# Altium PCB 串口版第二版.PcbDoc
Units mil, origin at the board's own origin, x right, y up, seen from the top; angles counter-clockwise.
Board outline 535 x 839 mil, 2 copper layers (Top Layer, Bottom Layer); 17 components, 17 nets, 68 pads, 17 vias.
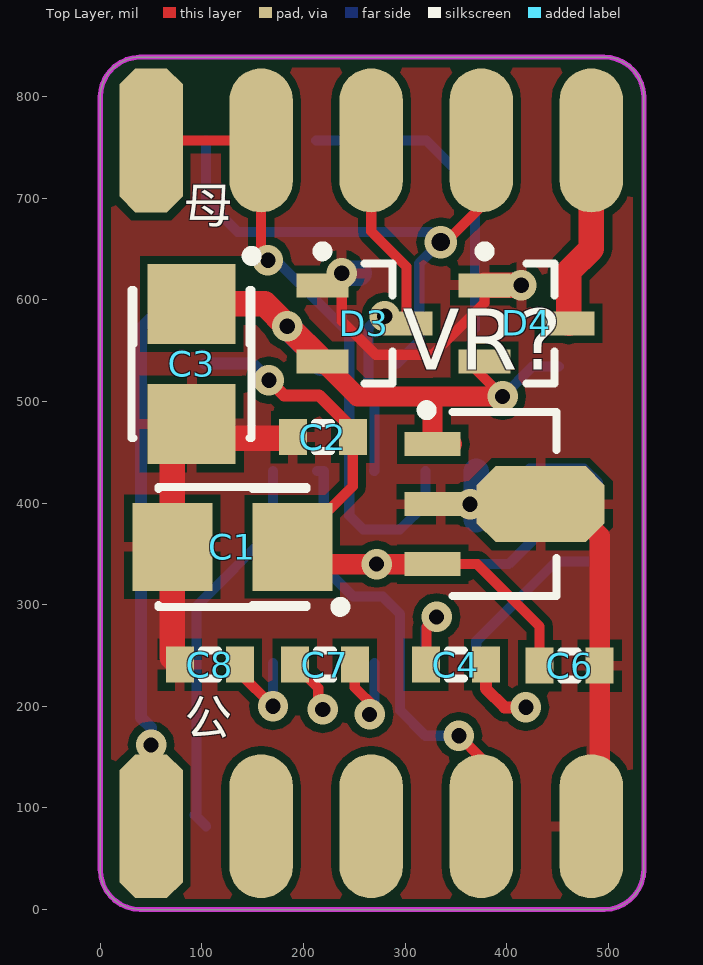
[diagram p0: Top Layer view]
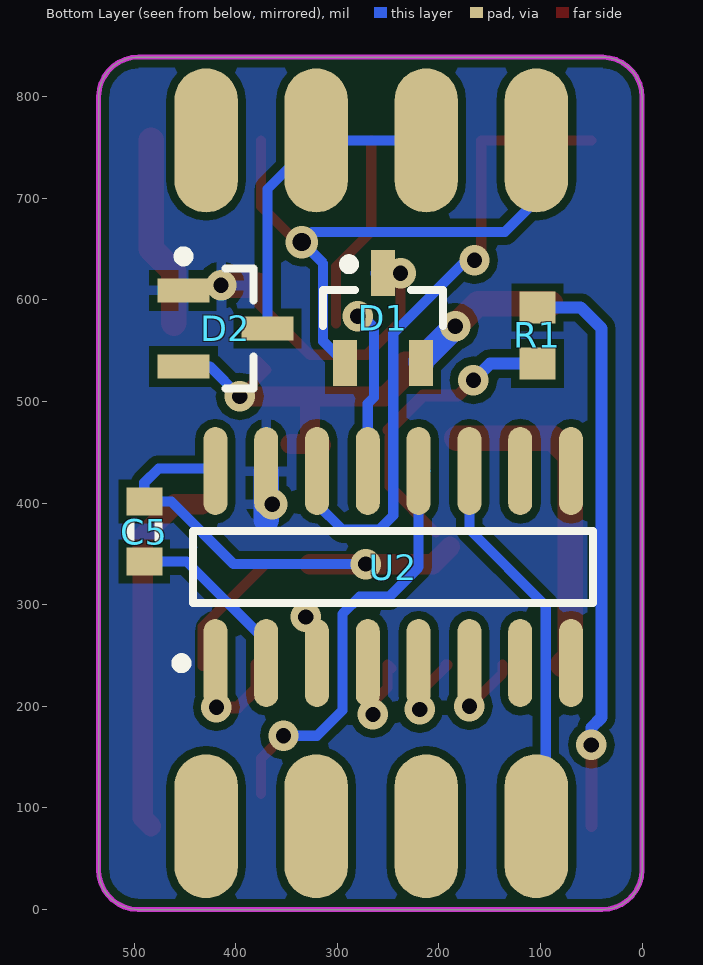
[diagram p1: Bottom Layer view, seen from below]
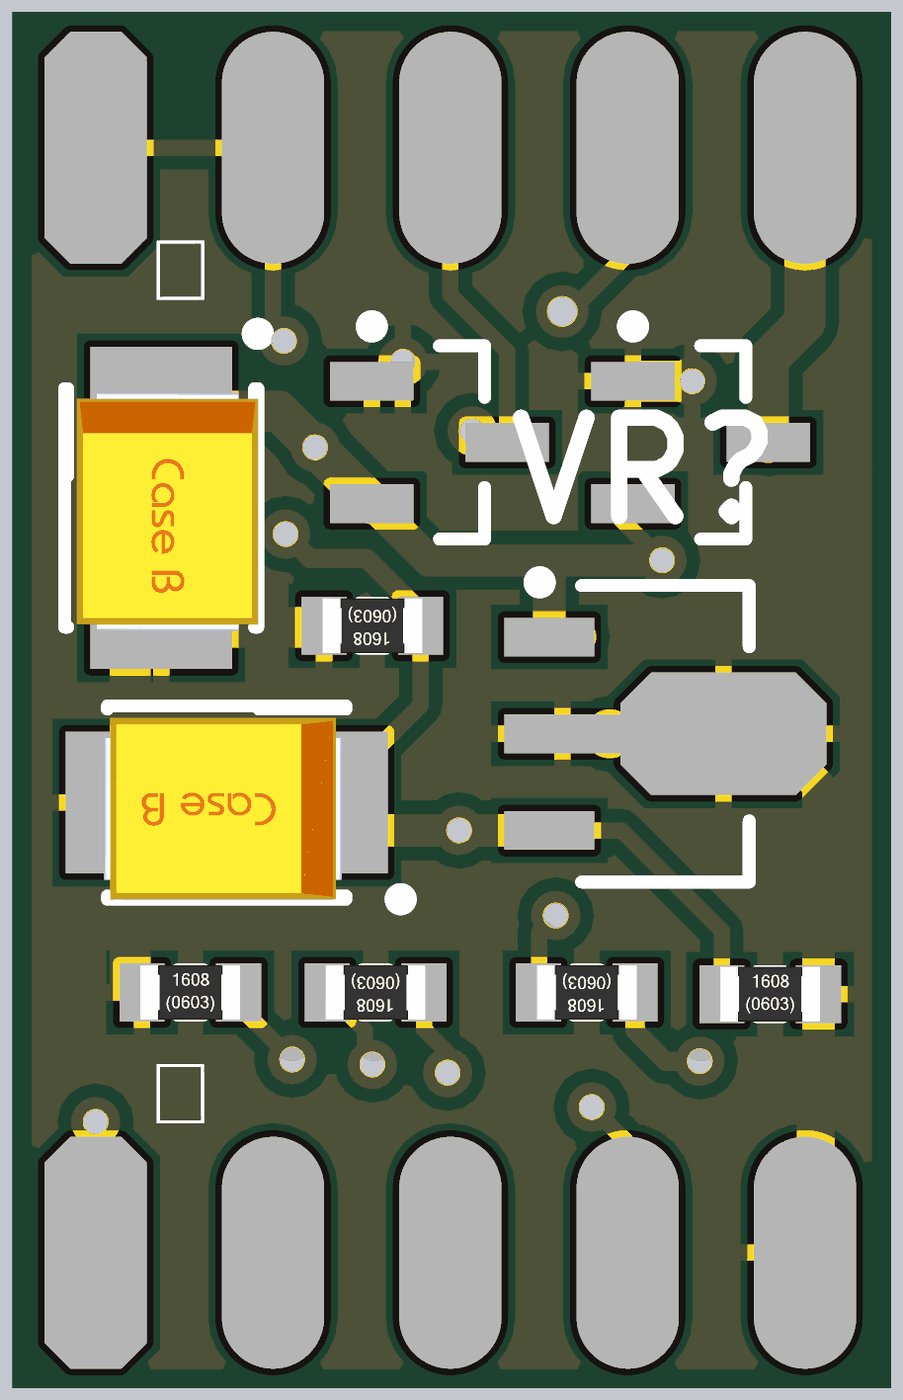
[diagram p2: 3D render of the assembled board from above, using the file's embedded part models]

## Layer stack, top to bottom
Top Layer: signal copper 1.4
Dielectric: dielectric 12.6, FR-4, Dk 4.8
Bottom Layer: signal copper 1.4

## Board outline
0,38.71 0,799.63 cw(c39.37,799.63) 38.71,838.99 38.71,839 495.63,839 cw(c495.63,799.63) 534.99,800.29 535,800.29 535,39.37 cw(c495.63,39.37) 496.29,0.01 496.29,0 39.37,0 cw(c39.37,39.37)

## Design rules (kind name [scope] priority, off if disabled: settings)
Clearance [All] p1: gap=8
PolygonConnect [All] p1: connectstyle=Relief reliefconductorwidth=10 reliefentries=4 polygonreliefangle="90 Angle"
RoomDefinition 串口板第二版 [InComponentClass('串口板第二版')] p1: confinementstyle=ConfineIn formatcopy=TRUE outline 0,7 534.57,7 534.57,832 0,832
RoutingVias [All] p1: holewidth=18 width=32 viastyle="Through Hole" minholewidth=15 minwidth=30 maxholewidth=28 maxwidth=50
SilkscreenOverComponentPads [All] p1: minsilkscreentomaskgap=10
SolderMaskExpansion [All] p1: expansion=4
Width [All] p1: maxlimit=100 minlimit=6 preferedwidth=10
27 further rules are at their usual default settings.

## Components (designator, comment, footprint, x,y, rotation, side; value= is the part's Value field where it differs from the comment)
C1 "Cap Pol1" 3528 130,357 r180 top
C2 "0.1uF" 0603R 219,465 r180 top
C3 "Cap Pol1" 3528 90,537 r270 top
C4 "0.1uF" 0603R 350,241 r180 top
C5 "0.1uF" 0603R 490,372 r90 bottom
C6 "0.1uF" 0603R 462,240 r0 top
C7 "0.1uF" 0603R 221,241 r180 top
C8 "0.1uF" 0603R 107.81,241 r0 top
D1 "BAT54S" SOT23_N#1 255,582 r90 bottom
D2 "BAT54S" SOT23_N#2 410,572 r180 bottom
D3 "BAT54S" SOT23_N#2 260,577 r0 top
D4 "BAT54S" SOT23_N#2 419.57,577 r0 top
R1 "Res2" 1608[0603] 103,565 r270 bottom
U2 "MAX232ESE" SOIC16_N 245,337 r90 bottom
VR? "Volt Reg" SOT89N 398,399 r0 top
公 "DB9" DB9BSM 50,82 r0 top
母 "DB9" DB9BSM 50,757 r0 top (schematic designator ĸ)

## Footprints (in the part's own frame and the unit in brackets; to place one, negate y for a bottom-side part, rotate by r counter-clockwise, add the part's x,y. Pads: shape width x height; smd on the part's side, far side on the other; paste and mask are expansions set on the pad)
0603R [mm]
  rect 0.7x0.9 smd: 1(-0.75,0) 2(0.75,0)
  silkscreen extent -0.2,-0.35 0.2,0.35, body extent -0.77,-0.42 0.78,0.43, height 0.45
1608[0603] [mm] "Chip Capacitor, Body 1.6x0.8mm, I"
  rect 0.8x0.9 smd: 1(-0.7,0) 2(0.7,0)
  body extent -0.87,-0.48 0.87,0.48, height 1.3
3528 [mm] "Capacitor, SM Tantalum; Body 3.5 x 2"
  rect 2x2.2 smd: 1(-1.5,0) 2(1.5,0)
  silkscreen extent -2.83,-1.5 1.85,1.62, body extent -1.79,-1.31 1.9,1.51, height 2.74
DB9BSM [mil]
  oct 62.5x141.67 smd: 1(0,0)
  oval 62.5x141.67 smd: 2(108.33,0) 3(216.67,0) 4(325,0) 5(433.33,0)
  oval 62.5x141.67 smd far side: 6(54.17,0) 7(162.5,0) 8(270.83,0) 9(379.17,0)
SOIC16_N [mm] "SOIC, 16-Leads, Body 9.9x3.9mm, Pitch 1.27mm, IPC"
  oval 2.2x0.6 smd: 1(-2.4,4.445) 2(-2.4,3.175) 3(-2.4,1.905) 4(-2.4,0.635) 5(-2.4,-0.635) 6(-2.4,-1.905) 7(-2.4,-3.175) 8(-2.4,-4.445) 9(2.4,-4.445) 10(2.4,-3.175) 11(2.4,-1.905) 12(2.4,-0.635) 13(2.4,0.635) 14(2.4,1.905) 15(2.4,3.175) 16(2.4,4.445)
  silkscreen extent -2.52,-5 0.9,5.42, body extent -2,-5 2,5, height 1.91
SOT23_N#1 [mm] "SOT23, 3-Leads, Body 2.9x1.3mm, Pitch 0.95mm, Lead Span 2.3mm - Reverse Pinning, IPC"
  rect 1.15x0.6 smd: 1(1.125,0) 2(-1.125,-0.95) 3(-1.125,0.95)
  silkscreen extent -0.2,-1.5 1.47,1.5, body extent -0.7,-1.5 0.7,1.5, height 1.1
SOT23_N#2 [mm] "SOT23, 3-Leads, Body 2.9x1.3mm, Pitch 0.95mm, Lead Span 2.3mm, IPC"
  rect 1.3x0.6 smd: 1(-1.05,0.95) 2(-1.05,-0.95) 3(1.05,0)
  silkscreen extent -1.18,-1.5 0.7,1.92, body extent -0.7,-1.5 0.7,1.5, height 1.1
SOT89N [mm] "SOT89, 3-Leads, Body 4.5x2.4 mm, Pitch 1.5mm, Lead Span 4.1mm, IPC Medium De"
  rect 1.4x0.6 smd: 1(-1.8,1.5) 3(-1.8,-1.5)
  rect 1.8x0.6 smd: 2(-1.6,0)
  oct 3.2x1.9 smd: 2(0.9,0)
  silkscreen extent -2.07,-2.3 1.3,2.47, body extent -1.3,-2.3 1.3,2.3, height 1.6

## Part data
C1 C3: "Polarized Capacitor (Radial)"
C2 C4 C5 C6 C7 C8: library part CAP, "Capa"
D1 D2 D3 D4: "Schottky Barrier Double Diode"
R1: "Resistor"
U2: "+5V Powered, Multi-Channel RS-232 Driver/Receiver"
VR?: "Voltage Regulator"

## Via types
v1: diameter 30, hole 15, Top Layer to Bottom Layer, tented both sides, 16 vias
v2: diameter 32, hole 18, Top Layer to Bottom Layer, tented both sides, 1 vias

## Nets (pads, with @x,y where several pads share a name; then routed paths per layer and width w, separated by ;. In a path a pad name is that pad's centre, name@x,y a point inside that pad or via, vN(x,y) a via of type N, cw(c..) or ccw(c..) an arc to the next point about the centre after c; other vN are vias at no path point)
GND: C1.2 C2.2 C3.2 C6.2 C8.1 D1.1 D2.1 D3.1 D4.1 U2.15 VR?.2 公.5 | length 1028.5
  Top Layer w10: v1(237.71,626.29) 237.71,579.29 271,546 327,546 378.23,597.23 D4.1
  Top Layer w20: VR?.2@433.43,399 460,399 491.53,367.47 C6.2 491.53,90.2 公.5
  Top Layer w25: C8.1 70.94,248.33 C1.2 70.94,447 87.94,464 C2.2@182.47,464 ; D4.1 v1(414.4,614.4)
  Bottom Layer w25: v1(237.71,626.29) D1.1 ; 370,383.81 U2.15
  other v1: 364,399
NetC4_1: C4.1 U2.1 | length 70.7
  Top Layer w11.81: C4.1 379.53,217.47 398,199 v1(419,199)
NetC4_2: C4.2 U2.3 | length 103.2
  Top Layer w10: C4.2@321,239 321,278 v1(331,288)
  Bottom Layer w10: U2.3 320,277 v1(331,288)
NetC5_1: C5.1 U2.2 | length 174
  Bottom Layer w10: U2.2 370,264 448.47,342.47 C5.1
NetC7_1: C7.1 U2.4 | length 116.7
  Top Layer w10: C7.1@247,237.47 C7.1 250.53,218.47 270,199 265,194 v1(265,192)
  Bottom Layer w10: v1(265,192) 270,197 U2.4
NetC7_2: C7.2 U2.5 | length 57.4
  Top Layer w10: C7.2@193.49,241 C7.2 214.47,218 214.47,201.53 v1(219,197)
NetC8_2: C8.2 U2.6 | length 110.7
  Top Layer w10: C8.2 137.33,232.67 v1(170,200) v1@160.33,209.67
  Bottom Layer w10: v1(170,200) U2.6
NetD1_3: D1.3 母.4 母.6 | length 563.3
  Top Layer w10: v2(335,657) 340,657 375,692 母.4
  Bottom Layer w10: 母.6 104.17,697.83 135,667 325,667 v2(335,657) 314,636 314,559.31 D1.3
NetD2_3: D2.3 母.7 母.8 | length 313.1
  Bottom Layer w10: 母.7 母.8 368.66,709.17 D2.3
NetD4_3: D4.3 母.5 | length 189.3
  Top Layer w25: D4.3 460.91,627.91 483.33,650.33 母.5
RX: U2.14 母.1 母.2 | length 641.7
  Top Layer w10: 母.1 母.2 158.33,645.67 v1(165,639)
  Bottom Layer w10: v1(165,639) 173,639 245,567 245,387.81 258.81,374 295,374 320,399 U2.14
RXD0: U2.12 公.4 | length 424.5
  Top Layer w10: v1(353,171) 375,149 公.4@375,114
  Bottom Layer w10: U2.12@213.49,431.49 U2.12 220,337 249,308 278,308 295,291 295,196 320,171 v1(353,171)
TX: D3.3 U2.13 母.3 | length 350.3
  Top Layer w10: 母.3 266.67,667.33 301.34,632.66 D3.3
  Bottom Layer w10: U2.13@269.59,431.9 U2.13 270,498 264,504 264,573 v1@272,581
  other v1: 280,584
TXD0: U2.11 公.6 | length 387.1
  Bottom Layer w10: 公.6@93,93.17 公.6@94.81,91.36 ; 公.6 公.6@94.81,91.36 ; U2.11 170,374 94.81,298.81 公.6@94.81,91.36
VCC5V: R1.1 公.1 | length 572.7
  Top Layer w11.81: 公.1 v1@50,169
  Bottom Layer w11.81: v1(50,162) 50,179 40,189 40,572 60.56,592.56 R1.1
VDD5V: C1.1 C2.1 C5.2 C6.1 R1.2 U2.16 VR?.3 | length 939.8
  Top Layer w10: C1.1@203.05,371 248.53,416.47 C2.1 ; v1(272,340) v1@272.06,339.94 ; VR?.3 371.06,339.94 432.47,278.53 C6.1
  Top Layer w11.81: v1(166,521) 181,506 215.53,506 C2.1@249.53,472
  Top Layer w20: C1.1 206.06,340 v1(272,340) VR?.3@327.08,340
  Bottom Layer w10: v1(272,340) 272.06,339.94 401.94,339.94 463.53,401.53 C5.2 490,420 476,434 422.51,434 U2.16
  Bottom Layer w11.81: R1.2 149.56,537.44 v1(166,521)
VDD5V0: C3.1 D1.2 D2.2 D3.2 D4.2 VR?.1 | length 606.1
  Top Layer w10: D4.2@378.23,535.77 D4.2 369.81,531.19 v1(396,505)
  Top Layer w19.68: D3.2@233.4,539.6 D3.2 253.26,505 327,505 ; VR?.1@316,457 VR?.1@327.13,457 ; VR?.1@346.06,458.06 VR?.1 327.13,504.87 327,505 ; v1(396,505) 327,505
  Top Layer w25: C3.1 161.95,596.05 v1(184,574) 184.26,574 D3.2
  Bottom Layer w10: v1(396,505) 425.6,534.6 D2.2
  Bottom Layer w25: v1(184,574) 217.6,540.4 D1.2
pads on no net: U2.7 U2.8 U2.9 U2.10 公.2 公.3 公.7 公.8 公.9 母.9

## Polygon pours and split planes (outlines as drawn)
GND on Top Layer "Keep-Out Layer-No Net" (solid, pour order 2): 0,839 535,839 535,0 0,0 0,839
GND on Bottom Layer "Keep-Out Layer-No Net" (solid, pour order 4): 0,839 535,839 535,0 0,0 0,839

## Keep-outs
Keep-Out Layer:
  the board outline again, w5